# Altium PCB ip_phone_pcb.PcbDoc (part 2 of 3)
Units mil, origin at the board's own origin, x right, y up, seen from the top; angles counter-clockwise.
Board outline 2401.57 x 6885.83 mil, 6 copper layers (Component Side, Ground Plane, Inner Layer 1, Inner Layer 2, Power Plane, Solder Side), stack 60.4 mil thick; 371 components, 298 nets, 1234 pads, 663 vias.
Unrouted connection lines stored in the file: 204.
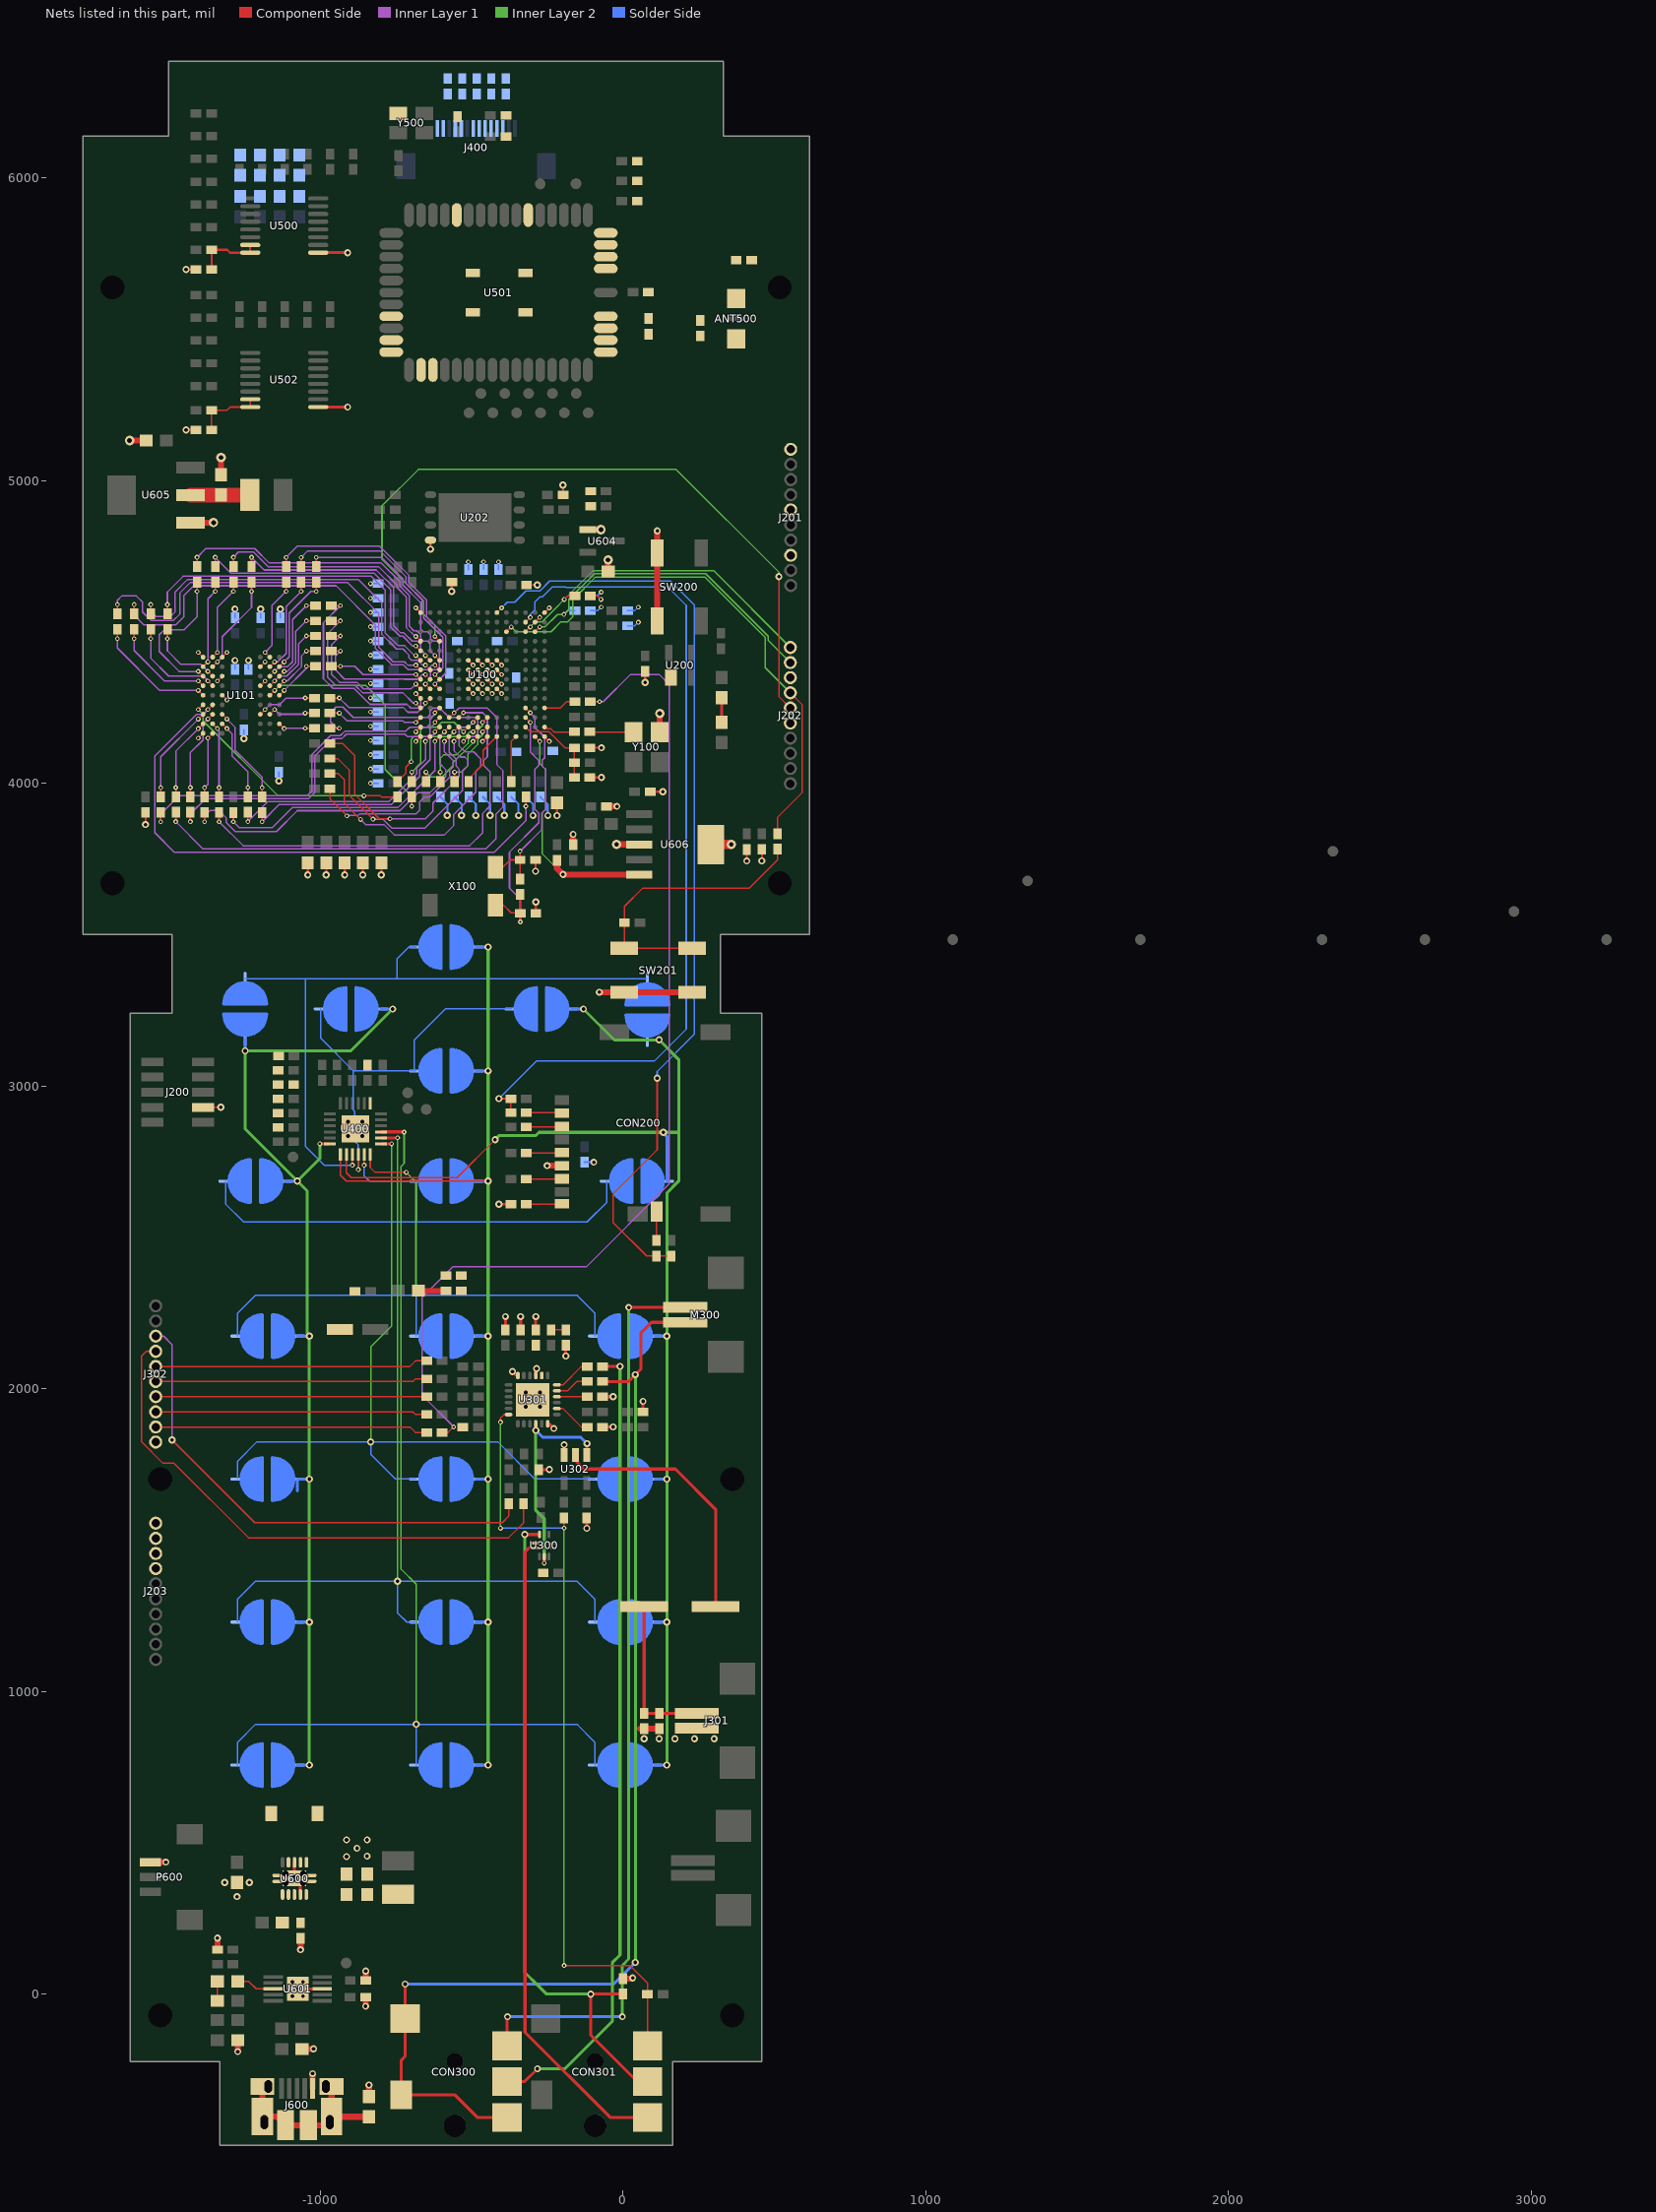
[diagram p6: the nets of this part, all layers, seen from the top]

## Via types
v1: diameter 15.75, hole 7.87, Component Side to Solder Side, tented top, 364 vias
v2: diameter 23.62, hole 11.81, Component Side to Solder Side, 201 vias
v3: diameter 23.62, hole 11.81, Component Side to Solder Side, tented bottom, 24 vias
v4: diameter 25.98, hole 12.99, Component Side to Solder Side, tented top, 23 vias
v5: diameter 31.5, hole 15.75, Component Side to Solder Side, 18 vias
v6: diameter 15.75, hole 7.87, Component Side to Solder Side, 13 vias
v7: diameter 23.62, hole 11.81, Component Side to Solder Side, tented top, 6 vias
v8: diameter 17.72, hole 11.81, Component Side to Solder Side, 5 vias
v9: diameter 19.68, hole 19.68, Component Side to Solder Side, 5 vias
v10: diameter 23.62, hole 11.81, Component Side to Solder Side, tented both sides, 4 vias

## Nets (pads, with @x,y where several pads share a name; then routed paths per layer and width w, separated by ;. In a path a pad name is that pad's centre, name@x,y a point inside that pad or via, vN(x,y) a via of type N, cw(c..) or ccw(c..) an arc to the next point about the centre after c; other vN are vias at no path point) (continued)
A5: R110.1 U101.J2 | length 221
  Component Side w5: R110.1@-1382.15,3955.42 v1(-1382.15,3986.08) ; v1(-1371.28,4149.64) U101.J2@-1355.54,4165.39
  Inner Layer 1 w5: v1(-1382.15,3986.08) -1371.28,3996.94 v1(-1371.28,4149.64)
A6: R112.1 U101.H3 | length 276.4
  Component Side w5: U101.H3@-1324.04,4196.88 v1(-1308.29,4181.13) ; R112.1@-1239.1,3955.7 v1(-1239.1,3986.36)
  Inner Layer 1 w5: v1(-1308.29,4181.13) -1291.83,4164.68 -1291.83,4091 -1239.1,4038.27 v1(-1239.1,3986.36)
A7: R114.1 U101.H2 | length 250.2
  Component Side w5: U101.H2@-1355.54,4196.88 v1(-1339.79,4181.13) ; R114.1@-1334.33,3955.51 v1(-1334.33,3986.17)
  Inner Layer 1 w5: v1(-1339.79,4181.13) -1334.33,4175.68 v1(-1334.33,3986.17)
A8: R116.1 U101.H1 | length 278.5
  Component Side w5: R116.1@-1477.33,3955.83 v1(-1477.33,3986.49) ; v1(-1402.78,4181.13) U101.H1@-1387.03,4196.88
  Inner Layer 1 w5: v1(-1477.33,3986.49) -1477.33,4106.58 v1(-1402.78,4181.13)
A9: R118.1 U101.G3 | length 327.8
  Component Side w5: U101.G3@-1324.04,4228.38 v1(-1308.29,4212.63) ; R118.1@-1192.15,3955.24 v1(-1192.15,3985.9)
  Inner Layer 1 w5: v1(-1308.29,4212.63) -1280.83,4185.17 -1280.83,4109 -1192.15,4020.31 v1(-1192.15,3985.9)
A10: R120.1 U101.H9 | length 123.1
  Component Side w5: U101.H9@-1135.06,4196.88 v1(-1119.32,4181.13) ; v1(-1049.69,4182.35) R120.1@-1019.03,4182.35
  Inner Layer 1 w5: v1(-1119.32,4181.13) -1118.09,4182.35 v1(-1049.69,4182.35)
A11: R122.1 U101.G2 | length 303.1
  Component Side w5: R122.1@-1429.1,3955.7 v1(-1429.1,3986.36) ; v1(-1371.28,4212.63) U101.G2@-1355.54,4228.38
  Inner Layer 1 w5: v1(-1429.1,3986.36) -1429.1,4101.57 -1387.41,4143.27 -1387.41,4196.51 v1(-1371.28,4212.63)
A12: R124.1 U101.G1 | length 331
  Component Side w5: R124.1@-1527.15,3955.42 v1(-1527.15,3986.08) ; v1(-1402.78,4212.63) U101.G1@-1387.03,4228.38
  Inner Layer 1 w5: v1(-1527.15,3986.08) -1527.15,4088.26 v1(-1402.78,4212.63)
ABE0: R132.2 U101.E8 | length 822.9
  Component Side w5: U101.E8@-1166.56,4291.37 v1(-1150.81,4307.12) ; v1(-697.85,3924.55) R132.2@-697.85,3955.21
  Inner Layer 2 w5: v1(-1150.81,4307.12) -1134.69,4323.24 -1112.95,4323.24 -1112.67,4323.52 -849.37,4323.52 -785.83,4259.98 -785.83,4045.57 -697.85,3957.59 v1(-697.85,3924.55)
ABE1: R131.2 U101.F1 | length 812.6
  Component Side w5: v1(-1402.78,4244.13) U101.F1@-1387.03,4259.87 ; v1(-855.83,3959) -801.83,3959 -798.05,3955.21 R131.2@-744.85,3955.21
  Inner Layer 2 w5: v1(-1402.78,4244.13) -1387.03,4228.38 -1387.03,4206.64 -1139.4,3959 v1(-855.83,3959)
AGND: ANT500.B C100.1 C101.1 C102.1 C103.1 C104.1 C105.1 C106.1 C107.1 C108.1 C109.1 C110.1 C200.1 C201.1 C202.1 C300.1 C301.1 C302.1 C303.2 C304.1 C307.1 C309.1 C310.2 C311.2 C312.2 C313.2 C314.1 C315.1 C400.2 C401.2 C402.2 C403.2 C404.2 C405.1 C500.2 C501.2 C502.2 C503.2 C504.2 C505.1 C506.1 C507.1 C508.1 C509.1 C600.1 C601.1 C602.1 C603.1 C604.1 C605.1 C610.2 C611.1 C612.1 C613.1 C614.1 C615.1 C616.1 C617.1 C618.1 C619.1 C620.1 C621.1 C622.1 C623.1 C624.1 C625.1 C626.1 C627.1 C628.1 C629.1 C630.1 C631.1 C632.1 C633.1 C634.1 C635.1 C636.1 C637.1 C638.1 C639.1 C640.1 C641.1 C642.1 C643.1 C644.1 C645.1 C646.1 C647.1 C648.1 C649.2 C650.1 C651.2 C652.1 C653.1 C654.1 C655.1 C656.1 CON200.6 J200.7 J201.3 J201.6 J201.10 J202.3 J202.6 J203.7 J203.8 J203.9 J203.10 J301.2 J302.10 J400.7 J600.5 L500.1 L500.2 L602.2 P600.1 R143.1 R144.1 R222.1 R235.1 R303.2 R314.2 R316.1 R318.2 R412.1 R605.1 R606.2 R608.2 R615.1 SW200.1 SW200.2 SW201.1 SW201.2 U100.A1 U100.A14 U100.B2 U100.F6 U100.F7 U100.F8 U100.F9 U100.G6 U100.G7 U100.G8 U100.G9 U100.G14 U100.H6 U100.H7 U100.H8 U100.H9 U100.J6 U100.J7 U100.J8 U100.J9 U100.P1 U100.P13 U100.P14 U101.A1 U101.A3 U101.B7 U101.C3 U101.D7 U101.E3 U101.J1 U200.1 U202.4 U300.6 U301.3 U301.6 U301.18 U302.3 U400.0 U400.19 U500.1 U501.6 U501.12 U501.24 U501.26 U501.27 U501.29 U501.30 U501.44 U501.45 U501.46 U501.47 U501.49 U501.50 U501.51 U501.52 U501.53 U501.54 U501.55 U501.56 U502.1 U600.3 U600.9 U600.15 U601.3 U604.1 U605.1 U606.3 U606.6 Y100.2 Y500.2 | length 5226.3
  Component Side w5: v1(-1402.78,4149.64) U101.J1@-1387.03,4165.39 ; v1(-1402.78,4433.1) U101.A1@-1387.03,4417.35 ; J200.7@-1387,2929.89 v2(-1328.21,2929.89) ; v1(-1339.79,4338.61) U101.C3@-1324.04,4354.36 ; U101.E3@-1324.04,4291.37 v1(-1308.29,4275.62) ; U101.A3@-1324.04,4417.35 v1(-1308.29,4433.1) ; U101.D7@-1198.06,4322.87 v1(-1182.31,4338.61) ; U101.B7@-1198.06,4385.86 v1(-1182.31,4401.61)
  Component Side w7: v2@-1577.19,3864.26 R144.1@-1577.19,3904.24 ; v2(-1443.23,5168.23) C508.1@-1410.27,5168.23 ; v2(-1443.23,5698.23) C507.1@-1410.27,5698.23 ; v2@-1041,3697.91 C613.1@-1041,3737.89 ; v2@-980,3697.91 C614.1@-980,3737.89 ; v2@-919,3697.91 C626.1@-919,3737.89 ; v2@-859,3697.91 C625.1@-859,3737.89 ; v2@-798,3697.91 C652.1@-798,3737.89 ; v1(-684.23,4139.16) U100.P14@-668.48,4154.91 ; v1(-684.23,4170.65) U100.P13@-668.48,4186.4 ; v1(-684.23,4580.1) U100.P1@-668.48,4564.35 ; v2(-635.74,4773.91) U202.4@-635.74,4803.99 ; v2(-565.74,4634.09) R222.1@-565.74,4665.99 ; U100.J9@-511,4312.39 v1(-495.25,4296.64) ; U100.J8@-511,4343.88 v1(-495.25,4328.13) ; U100.J7@-511,4375.38 v1(-495.25,4359.63) ; U100.J6@-511,4406.87 v1(-495.25,4391.13) ; U100.H9@-479.5,4312.39 v1(-463.76,4296.64) ; U100.H8@-479.5,4343.88 v1(-463.76,4328.13) ; U100.H7@-479.5,4375.38 v1(-463.76,4359.63) ; U100.H6@-479.5,4406.87 v1(-463.76,4391.13) ; v1(-463.76,4139.16) U100.G14@-448.01,4154.91 ; U100.G9@-448.01,4312.39 v1(-432.26,4296.64) ; U100.G8@-448.01,4343.88 v1(-432.26,4328.13) ; U100.G7@-448.01,4375.38 v1(-432.26,4359.63) ; U100.G6@-448.01,4406.87 v1(-432.26,4391.13) ; U100.F9@-416.51,4312.39 v1(-400.76,4296.64) ; U100.F8@-416.51,4343.88 v1(-400.76,4328.13) ; U100.F7@-416.51,4375.38 v1(-400.76,4359.63) ; U100.F6@-416.51,4406.87 v1(-400.76,4391.13) ; v2(-409.76,2609.62) R235.1@-370.34,2609.62 ; U100.B2@-290.53,4532.86 v1(-274.78,4548.61) ; v2(-288.85,3710.02) C109.1@-288.85,3747.39 ; C110.1@-287.85,3571.39 v2(-287.85,3608.77) ; U100.A14@-259.03,4154.91 v1(-243.28,4139.16) ; U100.A1@-259.03,4564.35 v1(-243.28,4580.1) ; v2@-218,3893.94 C637.1@-218,3933.92 ; C201.1@-198,4953.89 v2(-198,4985.65) ; C101.1@-109.18,4019.85 v2(-70.98,4019.85) ; R143.1@-109.18,4117.85 v2(-70.98,4117.85) ; v2(73.15,4334.02) C200.1@73.15,4370.39 ; C100.1@91.61,3972.85 v2(131.58,3972.85) ; v2(408.97,3743.83) C649.2@408.97,3782.03 ; v2(458.97,3744.02) C650.1@458.97,3782.21
  Component Side w10: U600.3@-1085.28,435.52 v9(-1085.28,382.37) -1065.59,362.69 U600.9@-1065.59,329.22 ; v8(-1074.34,17.35) U601.3@-993.63,17.35 ; U502.1@-1006.91,5243.52 v2(-909.52,5243.52) ; U500.1@-1006.91,5753.52 v2(-909.52,5753.52) ; C312.2@-388.2,2194.96 v2(-388.2,2238.62) ; v7(-365.2,2056.62) -352.36,2043.78 U301.6@-347.26,2043.78 ; C313.2@-338.2,2194.96 v2(-338.2,2238.62) ; U301.3@-288.2,2043.78 -288.2,2063.62 v7(-285.2,2066.62) ; C310.2@-288.2,2194.96 v2(-288.2,2238.62) ; R303.2@-277.57,1733.15 v2(-243.07,1733.15) ; U301.18@-248.83,1884.33 -244.07,1884.33 v7(-228.63,1868.9) ; U302.3@-194.44,1780.65 v2(-194.44,1815.16) ; v2(-188.93,2107.96) C304.1@-188.93,2143.71 ; v3(-119.64,1539.07) C315.1@-119.64,1573.72 ; C311.2@-67.14,1873.9 v2(-32.63,1873.9) ; C307.1@-67.14,1973.9 v2(-32.63,1973.9) ; R316.1@66.23,1923.9 v2(66.23,1958.4)
  Component Side w20: v5(-1629.89,5132.89) C635.1@-1575,5132.89 ; P600.1@-1561,435.89 -1560.74,436.15 v2(-1509.88,436.15) ; U605.1@-1427.96,4861.89 v5(-1352.58,4861.89) ; R608.2@-1339.5,146.98 v2(-1339.5,184.93) ; C636.1@-1328,5021.86 v5(-1328,5076.75) ; v2(-1272.63,-189.96) C605.1@-1272.63,-152.02 ; v2(-1064.91,146.57) C603.1@-1064.91,184.52 ; C604.1@-1060,-181.11 v2(-1022.06,-181.11) ; J600.5@-1025.64,-312.11 v2@-1025.64,-262.5 ; v2(-850,-39.97) R605.1@-850,-10.33 R605.1@-850,-10.11 ; R606.2@-849.82,46.89 v2(-849.82,76.6) ; L602.2@-839,-338.18 v2(-839,-300.24) ; v2(-250.28,2737.14) CON200.6@-201.83,2737.14 ; R615.1@-164.85,3797.39 v2(-164.85,3831.98) ; U604.1@-116.12,4838.48 v5(-72.73,4838.48) ; v2(-78.2,3310.22) SW201.2@4.59,3310.22 SW201.1@229,3310.22 ; C651.2@-54.67,3924.39 v2(-20.08,3924.39) ; C612.1@-49.12,4700.48 v5(-49.12,4738.39) ; v5(-21.23,3798.39) U606.3@54.15,3798.39 ; R314.2@0,51.18 29.75,51.18 v2(31.99,53.42) ; R318.2@56.96,876.67 R318.2@69.96,876.67 C309.1@106.96,876.67 ; SW200.1@113.26,4536.99 SW200.2@113.26,4761.4 v2(113.26,4834.78) ; Y100.2@121.64,4169.85 v5(121.64,4231.06)
  Component Side w30: U606.6@290.37,3798.39 v5(357.56,3798.39)
  Solder Side w5: C107.1@-1282.03,4377.35 v2(-1282.03,4406.35) ; C105.1@-1282.03,4547.35 v2(-1282.03,4576.35) ; v2(-1252.03,4148.35) C106.1@-1252.03,4177.35 ; C108.1@-1237.03,4377.35 v2(-1237.03,4406.35) ; C103.1@-1197.03,4547.35 v2(-1197.03,4576.35) ; v2(-1137.03,4008.35) C104.1@-1137.03,4037.35 ; C102.1@-1132.03,4547.35 v2(-1132.03,4576.35) ; v1(-834,4000.89) C631.1@-809,4000.89 ; v1(-834,4047.89) C654.1@-809,4047.89 ; v1(-834,4094.89) C655.1@-809,4094.89 ; v1(-834,4141.89) C632.1@-809,4141.89 ; v1(-834,4188.89) C618.1@-809,4188.89 ; v1(-834,4235.89) C656.1@-809,4235.89 ; v1(-834,4282.89) C634.1@-809,4282.89 ; v1(-834,4329.89) C633.1@-809,4329.89 ; v1(-834,4376.89) C627.1@-809,4376.89 ; v1(-834,4423.89) C628.1@-809,4423.89 ; v1(-834,4470.89) C617.1@-809,4470.89 ; v1(-834,4517.89) C620.1@-809,4517.89 ; v1(-834,4564.89) C619.1@-809,4564.89 ; v1(-834,4611.89) C621.1@-809,4611.89 ; v1(-834,4659.89) C622.1@-809,4659.89 ; C653.1@-511,4706.89 v1(-511,4731.89) ; C629.1@-460.63,4707.17 v1(-460.63,4732.17) ; C630.1@-411,4706.89 v1(-411,4731.89)
  Solder Side w7: C639.1@-603.85,3955.39 -580.15,3931.69 v2(-580.15,3894.24) ; C638.1@-556.85,3955.39 -533.15,3931.69 v2(-533.15,3894.24) ; C642.1@-509.85,3955.21 -486.15,3931.51 v2(-486.15,3894.06) ; C641.1@-462.85,3955.39 -439.15,3931.69 v2(-439.15,3894.24) ; C640.1@-415.85,3955.39 -392.15,3931.69 v2(-392.15,3894.24) ; C643.1@-368.85,3955.21 -345.15,3931.51 v2(-345.15,3894.06) ; C645.1@-320.85,3955.21 -297.15,3931.51 v2(-297.15,3894.06) ; C644.1@-272.74,3955.21 -249.04,3931.51 -249.04,3894.06 -248.98,3894 v2(-247.83,3894) ; C202.1@-127.34,2748.62 v2(-96.53,2748.62)
  other v2: -1025.51,-262.5 -1274.91,322.22 -1315.67,368.52 -1234.26,368.52 -913.09,454.19 -845.09,455.77 -878.63,481.98 -913.09,509.77 -845.09,509.77 69.55,843.55 119.37,843.55 171.37,843.55 236.37,843.55 301.37,843.55 -1041.3,3697.91 -980.3,3697.91 -919.3,3697.91 -859.3,3697.91 -798.3,3697.91 -1577.48,3864.26 -218.3,3893.94
  other v4: -321.67,1940.43 -274.42,1940.43 -321.67,1987.68 -274.42,1987.68 -907.9,2835.05 -860.65,2835.05 -907.9,2882.3 -860.65,2882.3
  other v8: -1092.06,-6.27 -1056.62,-6.27 -1092.06,40.98 -1056.62,40.98
  other v9: -1114.8,366.62 -1055.75,366.62 -1114.8,398.12 -1055.75,398.12
AVCC3V3: C301.2 C302.2 C310.1 C311.1 L300.2 U301.2 U301.20 | length 211.1
  Component Side w5: U301.20@-218.32,1934.53 -198.02,1934.53 -137.39,1873.9 C311.1@-118.32,1873.9
  Component Side w20: L300.2@-670.86,2323.39 C301.2@-584.85,2323.39
BA0: R126.1 U101.G7 | length 201.4
  Component Side w5: U101.G7@-1198.06,4228.38 v1(-1182.31,4244.13) ; v1(-1049.69,4282.35) R126.1@-1019.03,4282.35
  Inner Layer 1 w5: v1(-1182.31,4244.13) -1166.56,4259.87 -1135.06,4259.87 -1112.58,4282.35 v1(-1049.69,4282.35)
BA1: R128.1 U101.G8 | length 161.9
  Component Side w5: U101.G8@-1166.56,4228.38 v1(-1150.81,4244.13) ; v1(-1049.69,4232.35) R128.1@-1019.03,4232.35
  Inner Layer 1 w5: v1(-1150.81,4244.13) -1135.44,4228.75 -1053.3,4228.75 v1(-1049.69,4232.35)
BUTTON: R205.1 R223.1 SW201.3 SW201.4 | length 966.3
  Component Side w5: R223.1@4.59,3540.02 SW201.4@4.59,3455.89 SW201.3@229,3455.89 ; R223.1@4.97,3540.39 4.97,3593.39 65.97,3654.39 417.97,3654.39 509.97,3746.39 R205.1@509.97,3782.8
CLKOUT: R142.2 U101.F2 | length 1889.1
  Component Side w5: v1(-1371.28,4244.13) U101.F2@-1355.54,4259.87 ; v1(-320.85,3924.55) R142.2@-320.85,3955.21
  Inner Layer 1 w5: v1(-1371.28,4244.13) -1387.41,4228 -1409.15,4228 -1546.83,4090.32 -1546.83,3837.6 -1481.24,3772 -425.83,3772 -320.85,3876.98 v1(-320.85,3924.55)
COL: J202.4 pad.@360.91,1701.68 R205.2 U100.E3 | length 1791.3
  Component Side w5: U100.E3@-385.02,4501.36 v1(-369.27,4517.11) ; R205.2@509.97,3833.98 509.97,3887.39 591.37,3968.79 591.37,4260.99 J202.4@552.97,4299.39
  Inner Layer 2 w5: v1(-369.27,4517.11) -353.52,4501.36 -237.82,4501.36 -205.41,4533.77 -182.66,4533.77 -166.03,4550.39 -166.03,4606.82 -90.46,4682.39 269.97,4682.39 469.97,4482.39 469.97,4382.39 J202.4@552.97,4299.39
COL1: KB400.2 KB403.2 KB406.2 KB409.2 KB412.2 KB415.2 KB418.2 U400.8 | length 4360.1
  Component Side w5: U400.8@-913.8,2773.95 -913.8,2713.76 -897.84,2697.8 -547.84,2697.8 v3(-422.34,2823.3)
  Inner Layer 2 w10: v3(-422.34,2823.3) -408.24,2837.39 -287.03,2837.39 -277.03,2847.39 184.27,2847.39 ; v3(-130.69,3254.83) -28.71,3152.85 v10(119.54,3152.85) 184.27,3088.12 184.27,2685.93 144.9,2646.56 v3(144.9,1229.24) v3(144.9,756.8)
  Solder Side w10: KB403.2@-169.83,3254.83 v3(-130.69,3254.83) ; KB400.2@80.4,3152.85 v10(119.54,3152.85) ; KB418.2@105.76,756.8 v3(144.9,756.8) ; KB415.2@105.76,1229.24 v3(144.9,1229.24) ; KB412.2@105.76,1701.68 v3(144.9,1701.68) ; KB409.2@105.76,2174.12 v3(144.9,2174.12) ; v10@132.37,2847.39 145.13,2834.63 KB406.2@145.13,2685.93
  other v10: 133.37,2847.39
COL2: KB401.2 KB404.2 KB407.2 KB410.2 KB413.2 KB416.2 KB419.2 U400.7 | length 3541.1
  Component Side w5: U400.7@-933.49,2773.95 -933.49,2705.44 -913.98,2685.93 v3(-445.65,2685.93)
  Inner Layer 2 w10: v3(-445.65,756.8) v3(-445.65,1229.24) v3(-445.65,2685.93) v3(-445.65,3459.55)
  Solder Side w10: KB419.2@-484.79,756.8 v3(-445.65,756.8) ; KB416.2@-484.79,1229.24 v3(-445.65,1229.24) ; KB413.2@-484.79,1701.68 v3(-445.65,1701.68) ; KB410.2@-484.79,2174.12 v3(-445.65,2174.12) ; KB407.2@-484.79,2685.93 v3(-445.65,2685.93) ; KB404.2@-484.79,3050.1 v3(-445.65,3050.1) ; KB401.2@-484.79,3459.55 v3(-445.65,3459.55)
COL3: KB402.2 KB405.2 KB408.2 KB411.2 KB414.2 KB417.2 KB420.2 U400.6 | length 3492.4
  Component Side w10: v6(-1001.49,2809.46) U400.6@-969,2809.46
  Inner Layer 2 w10: v3(-1075.57,2685.93) -1001.49,2760.01 v6(-1001.49,2809.46) ; v3(-1036.2,756.8) v3(-1036.2,1229.24) v3(-1036.2,2174.12) -1043,2180.91 -1043,2653.36 -1248.34,2858.7 v3(-1248.34,3116.51) -898.93,3116.51 v3(-760.61,3254.83)
  Solder Side w10: v3(-1248.34,3116.51) KB402.2@-1248.34,3155.65 ; KB408.2@-1114.71,2685.93 v3(-1075.57,2685.93) ; KB420.2@-1075.34,756.8 v3(-1036.2,756.8) ; KB417.2@-1075.34,1229.24 v3(-1036.2,1229.24) ; -1075.34,1662.54 KB414.2@-1075.34,1701.68 v3(-1036.2,1701.68) ; KB411.2@-1075.34,2174.12 v3(-1036.2,2174.12) ; KB405.2@-799.75,3254.83 v3(-760.61,3254.83)
CRS_DV: J202.5 U100.M4 | length 2492.3
  Component Side w5: v1(-621.24,4485.61) U100.M4@-605.49,4469.87 ; v2(514.97,4683.39) 514.97,4287.39 J202.5@552.97,4249.39
  Inner Layer 2 w5: v1(-621.24,4485.61) -621.24,4521.5 -663.03,4563.29 -663.03,4606.54 -796.03,4739.54 -796.03,4917.39 -676.01,5037.41 175.95,5037.41 514.97,4698.39 v2(514.97,4683.39)
CS_SDCARD: R229.1 R232.1 U100.C2 | length 2823.8
  Component Side w5: v2(-409.76,2958.62) R229.1@-370.34,2958.62 R232.1@-370.34,2912.62 ; U100.C2@-322.02,4532.86 v1(-306.28,4548.61)
  Solder Side w5: v2(-409.76,2958.62) -285.99,3082.39 102.97,3082.39 208.97,3188.39 208.97,4588.11 148.68,4648.39 -151.8,4648.39 -151.97,4648.22 -187.8,4648.22 -187.97,4648.39 -234.03,4648.39 -266.03,4616.39 -274.03,4616.39 -290.9,4599.52 -290.9,4573.73 -306.28,4558.36 v1(-306.28,4548.61)
D0: R101.2 U101.A8 | length 282.9
  Component Side w5: v1(-1182.31,4433.1) U101.A8@-1166.56,4417.35 ; v1(-1112.96,4634.3) R101.2@-1112.96,4664.96
  Inner Layer 1 w5: v1(-1182.31,4433.1) -1159.15,4456.26 -1159.15,4588.11 v1(-1112.96,4634.3)
D1: R103.2 U101.B9 | length 340.3
  Component Side w5: U101.B9@-1135.06,4385.86 v1(-1119.31,4401.61) ; v1(-1012.96,4634.3) R103.2@-1012.96,4664.96
  Inner Layer 1 w5: v1(-1119.31,4401.61) -1102.72,4418.2 -1102.72,4562.66 -1031.08,4634.3 v1(-1012.96,4634.3)
D2: R105.2 U101.B8 | length 327.8
  Component Side w5: U101.B8@-1166.56,4385.86 v1(-1150.81,4401.61) ; v1(-1062.96,4634.3) R105.2@-1062.96,4664.96
  Inner Layer 1 w5: v1(-1150.81,4401.61) -1141.06,4401.61 -1112.72,4429.94 -1112.72,4584.35 -1112.81,4584.44 v1(-1062.96,4634.3)
D3: R107.2 U101.C9 | length 256.6
  Component Side w5: U101.C9@-1135.06,4354.36 v1(-1119.31,4370.11) ; v1(-1045.87,4537.35) R107.2@-1015.21,4537.35
  Inner Layer 1 w5: v1(-1119.31,4370.11) -1109.13,4370.11 -1081.25,4397.99 -1081.25,4501.98 v1(-1045.87,4537.35)
D4: R109.2 U101.C8 | length 329.8
  Component Side w5: U101.C8@-1166.56,4354.36 v1(-1150.81,4370.11) ; v1(-1045.87,4587.35) R109.2@-1015.21,4587.35
  Inner Layer 1 w5: v1(-1150.81,4370.11) -1135.44,4385.48 -1107.9,4385.48 -1091.25,4402.13 -1091.25,4541.98 v1(-1045.87,4587.35)
D5: R111.2 U101.D9 | length 188.3
  Component Side w5: U101.D9@-1135.06,4322.87 v1(-1119.31,4338.61) ; v1(-1045.87,4437.35) R111.2@-1015.21,4437.35
  Inner Layer 1 w5: v1(-1119.31,4338.61) -1108.77,4338.61 -1061.25,4386.13 -1061.25,4421.98 v1(-1045.87,4437.35)
D6: R113.2 U101.D8 | length 259.4
  Component Side w5: U101.D8@-1166.56,4322.87 v1(-1150.81,4338.61) ; v1(-1045.87,4487.35) R113.2@-1015.21,4487.35
  Inner Layer 1 w5: v1(-1150.81,4338.61) -1134.69,4354.74 -1110.36,4354.74 -1071.25,4393.85 -1071.25,4461.98 v1(-1045.87,4487.35)
D7: R115.2 U101.E9 | length 163.6
  Component Side w5: U101.E9@-1135.06,4291.37 v1(-1119.31,4307.12) ; v1(-1045.87,4387.35) R115.2@-1015.21,4387.35
  Inner Layer 1 w5: v1(-1119.31,4307.12) -1045.87,4380.56 v1(-1045.87,4387.35)
D8: R117.2 U101.E1 | length 409.6
  Component Side w5: v1(-1670.03,4478.51) R117.2@-1670.03,4509.17 ; v1(-1402.78,4307.12) U101.E1@-1387.03,4291.37
  Inner Layer 1 w5: v1(-1670.03,4478.51) -1670.03,4447.12 -1530.03,4307.12 v1(-1402.78,4307.12)
D9: R119.2 U101.D2 | length 337.3
  Component Side w5: v1(-1560.03,4478.51) R119.2@-1560.03,4509.17 ; v1(-1371.28,4338.61) U101.D2@-1355.54,4322.87
  Inner Layer 1 w5: v1(-1560.03,4478.51) -1560.03,4414.12 -1500.65,4354.74 -1387.41,4354.74 v1(-1371.28,4338.61)
D10: R121.2 U101.D1 | length 346.2
  Component Side w5: v1(-1615.03,4478.51) R121.2@-1615.03,4509.17 ; v1(-1402.78,4338.61) U101.D1@-1387.03,4322.87
  Inner Layer 1 w5: v1(-1615.03,4478.51) -1615.03,4439.12 -1514.52,4338.61 v1(-1402.78,4338.61)
D11: R123.2 U101.C2 | length 255.2
  Component Side w5: v1(-1505.03,4478.51) R123.2@-1505.03,4509.17 ; v1(-1371.28,4370.11) U101.C2@-1355.54,4354.36
  Inner Layer 1 w5: v1(-1505.03,4478.51) -1505.03,4438.12 -1460.15,4393.24 -1394.41,4393.24 v1(-1371.28,4370.11)
D12: R125.2 U101.C1 | length 498.5
  Component Side w5: v1(-1407.03,4634.51) R125.2@-1407.03,4665.17 ; v1(-1402.78,4370.11) U101.C1@-1387.03,4354.36
  Inner Layer 1 w5: v1(-1407.03,4634.51) -1407.03,4550.35 -1449.15,4508.24 -1515.15,4508.24 -1532.15,4491.24 -1532.15,4436.24 -1466.02,4370.11 v1(-1402.78,4370.11)
D13: R127.2 U101.B2 | length 332.5
  Component Side w5: U101.B2@-1355.54,4385.86 v1(-1339.79,4401.61) ; v1(-1227.03,4634.51) R127.2@-1227.03,4665.17
  Inner Layer 1 w5: v1(-1339.79,4401.61) -1323.67,4417.73 -1323.67,4484.72 -1227.03,4581.35 v1(-1227.03,4634.51)
D14: R129.2 U101.B1 | length 295.9
  Component Side w5: U101.B1@-1387.03,4385.86 v1(-1371.28,4401.61) ; v1(-1347.03,4634.51) R129.2@-1347.03,4665.17
  Inner Layer 1 w5: v1(-1371.28,4401.61) -1371.28,4610.26 v1(-1347.03,4634.51)
D15: R130.2 U101.A2 | length 276.2
  Component Side w5: U101.A2@-1355.54,4417.35 v1(-1339.79,4433.1) ; v1(-1287.03,4634.51) R130.2@-1287.03,4665.17
  Inner Layer 1 w5: v1(-1339.79,4433.1) -1339.79,4581.76 v1(-1287.03,4634.51)
DET_SDCARD: R230.1 R236.1 U100.F1 | length 3117.8
  Component Side w5: U100.F1@-416.51,4564.35 v1(-400.76,4580.1) ; v2(113,3026.42) 113,2789.42 -33.03,2643.39 -33.03,2549.69 77.85,2438.8 R230.1@159.16,2438.8
  Solder Side w5: v1(-400.76,4580.1) -382.03,4598.83 -357.59,4598.83 -320.03,4636.39 -274.32,4636.39 -242.32,4668.39 -179.68,4668.39 -179.51,4668.22 -160.25,4668.22 -160.08,4668.39 156.97,4668.39 186.97,4638.39 187.11,4638.39 235.97,4589.54 235.97,3171.36 113,3048.39 v2(113,3026.42)
EXT_WAKE: R614.2 U100.B14 U606.5 | length 811.4
  Component Side w5: U100.B14@-290.53,4154.91 v1(-274.78,4139.16)
  Component Side w20: R614.2@-217.85,3746.21 -217.85,3719.02 -197.23,3698.39 U606.5@54.15,3698.39
  Inner Layer 2 w5: v1(-274.78,4139.16) -274.78,4065.94 -255.83,4047 -255.83,3913.31 -267.15,3902 -267.15,3768.31 v2(-197.83,3699)
HP_GND: CON301.1 U300.7 | length 2148.6
  Component Side w10: U300.7@-288.74,1474.33 -310.2,1474.33 -323.63,1460.9 -323.63,-126.26 -42.68,-407.22 CON301.1@81,-407.22
HP_OUT: CON301.3 R314.1 U300.5 | length 2235.6
  Component Side w10: v2(-324.38,1518.62) U300.5@-275.95,1518.62 ; R314.1@0,0 v2(-106.45,0) -106.45,-135.45 47.21,-289.11 CON301.3@81,-289.11
  Inner Layer 2 w10: v2(-324.38,1518.62) -324.38,72.32 -281.01,28.95 -252.06,0 v2(-106.45,0)
JACK_EN: CON301.5 R310.1 R317.2 R409.1 U301.12 | length 2594.1
  Component Side w5: v6(-404.63,1889.9) -404.63,1902.9 -392.69,1914.84 U301.12@-377.77,1914.84 ; v6(-194.44,94.55) 23.12,94.55 80.55,37.12 80.55,0.45 R310.1@81,0 ; v6(-194.44,1539.98) R317.2@-194.44,1573.72 ; R310.1@76.97,0 R310.1@81,0 ; CON301.5@81,-171 R310.1@81,0
  Inner Layer 2 w5: v6@-404.63,1539.98 v6(-404.63,1889.9) ; v6(-194.44,94.55) v6(-194.44,1539.98)
  Solder Side w5: v6@-403.55,1539.98 v6(-194.44,1539.98)
  other v6: -404.63,1539.26
L\C\D\_\C\S\: J400.1 R402.1 R411.1 R412.2
L\C\D\_\R\E\S\E\T\: J400.2 R400.1 R410.1
LED1: D204.2 R203.1 | length 40
  Solder Side w5: R203.1@-107.74,4619.99 -84.68,4619.99 v1@-72.68,4631.99
  other v1: -71.87,4631.99
LED2: D203.2 R208.1 | length 40
  Component Side w5: R208.1@-107.74,4619.99 -84.68,4619.99 v1(-72.68,4607.99)
LED3: D202.2 R209.1 | length 40
  Solder Side w5: R209.1@-107.85,4570.39 -84.79,4570.39 v1@-72.79,4582.39
  other v1: -71.98,4582.39
LED4: D201.2 R215.1 | length 36.1
  Component Side w5: R215.1@-318.74,4655.99 v2(-282.63,4655.99)
LIN1: KB400.1 KB401.1 KB402.1 U400.9 | length 2240
  Component Side w5: v6(-894.12,2738.95) U400.9@-894.12,2773.95
  Solder Side w5: KB402.1@-1248.34,3354 KB400.1@77.6,3354 ; -1048.83,3354 -1048.83,2801 -986.79,2738.95 v6(-894.12,2738.95) ; -745.83,3354 -745.83,3421 -707.28,3459.55 KB401.1@-683.15,3459.55
LIN2: KB403.1 KB404.1 KB405.1 U400.10 | length 1307.5
  Component Side w5: v6(-874.43,2723.95) U400.10@-874.43,2773.95
  Solder Side w5: KB405.1@-998.11,3254.83 -998.11,3157.71 -890.5,3050.1 ; v6(-874.43,2723.95) -874.43,2805.6 -886.63,2817.8 -886.63,2916.8 -890.5,2920.67 -890.5,3050.1 ; KB403.1@-368.19,3254.83 -587.01,3254.83 -688.83,3153 -688.83,3055.79 KB404.1@-683.15,3050.1 -890.5,3050.1
LIN3: KB406.1 KB407.1 KB408.1 U400.11 | length 1840.1
  Component Side w5: v6(-854.75,2738.95) U400.11@-854.75,2773.95
  Solder Side w5: KB408.1@-1313.06,2685.93 -1313.06,2610.74 -1253.37,2551.05 -118.79,2551.05 -53.22,2616.61 KB406.1@-53.22,2685.93 ; v6(-854.75,2738.95) -854.75,2702.91 -837.76,2685.93 KB407.1@-683.15,2685.93 -683.15,2551.74
LIN4: KB409.1 KB410.1 KB411.1 U400.12 | length 2105.9
  Component Side w5: U400.12@-835.06,2773.95 -835.06,2731.23 -818.83,2715 v6(-715.83,2715)
  Inner Layer 2 w5: v6(-715.83,2715) -683.83,2683 -683.83,2309
  Solder Side w5: KB411.1@-1273.7,2174.12 -1273.7,2249.3 -1214,2309 -150,2309 ; KB410.1@-683.15,2174.12 -683.15,2308.85 ; -152.29,2309 -92.59,2249.3 KB409.1@-92.59,2174.12
LIN5: KB412.1 KB413.1 KB414.1 U400.13 | length 2590.5
  Component Side w10: U400.13@-799.55,2809.46 v6(-764.55,2809.46)
  Inner Layer 2 w5: v2(-833.26,1824.79) -833.26,2138.47 -764.55,2207.18 v6(-764.55,2809.46)
  Solder Side w5: KB414.1@-1273.7,1701.68 -1273.7,1759.79 -1208.7,1824.79 -414.01,1824.79 -290.9,1701.68 KB412.1@-92.59,1701.68 ; v2(-833.26,1824.79) -833.26,1783.65 -751.28,1701.68 KB413.1@-683.15,1701.68
LIN6: KB415.1 KB416.1 KB417.1 U400.14 | length 3081.2
  Component Side w10: U400.14@-799.55,2829.15 v6(-744.55,2829.15)
  Inner Layer 2 w5: v3@-745.83,1364.12 -744.55,1365.4 v6(-744.55,2829.15)
  Solder Side w5: KB417.1@-1273.7,1229.24 -1273.7,1304.42 -1214,1364.12 -152.29,1364.12 -92.59,1304.42 KB415.1@-92.59,1229.24 ; v3@-744.55,1365.4 -744.55,1259.72 -714.07,1229.24 KB416.1@-683.15,1229.24
  other v3: -744.83,1364.12
LIN7: KB418.1 KB419.1 KB420.1 U400.15 | length 3575.9
  Component Side w10: U400.15@-799.55,2848.83 v6@-722.83,2848.83
  Inner Layer 2 w5: v6(-722.83,2848) -722.83,2745 -732.83,2735 -732.83,1404 -683.15,1354.31 v3@-683.15,891.53
  Solder Side w5: KB420.1@-1273.7,756.8 -1273.7,831.98 -1214,891.68 -150,891.68 ; KB419.1@-683.15,756.8 v3@-683.15,891.53 ; -152.29,891.68 -92.59,831.98 KB418.1@-92.59,756.8
  other v3: -682.83,891.68
MCLK: R326.2 U100.A11 | length 108.7
  Component Side w5: U100.A11@-259.03,4249.39 -207.44,4249.39 -186.44,4270.39 R326.2@-159.03,4270.39
MCLK_CON: R325.1 R326.1 R333.2 | length 3449.7
  Component Side w5: R333.2@-597.45,1855.79 -577.72,1855.79 v1(-559.61,1873.9) ; R326.1@-107.85,4270.39 v1(-77.19,4270.39)
  Inner Layer 1 w5: v1(-559.61,1873.9) -559.61,1874.62 -663.04,1978.06 -663.04,2302.19 -561.18,2404.06 -119.75,2404.06 153.15,2676.95 153.15,4326.39 119.15,4360.39 24.81,4360.39 -65.19,4270.39 v1(-77.19,4270.39)
MDC: J202.1 R208.2 U100.C3 | length 1104.4
  Component Side w5: U100.C3@-322.02,4501.36 v1(-306.28,4517.11) ; v1(-193.98,4607.99) -181.98,4619.99 R208.2@-158.92,4619.99
  Inner Layer 2 w5: v1(-306.28,4517.11) -290.15,4533.23 -268.41,4533.23 -227.91,4573.73 ; -227.91,4574.06 -227.91,4573.73 ; J202.1@552.97,4449.39 298.97,4703.39 -98.58,4703.39 v1(-193.98,4607.99) -193.98,4607.66 -227.91,4573.73
MDIO: J202.2 R209.2 U100.B3 | length 1112.9
  Component Side w5: U100.B3@-290.53,4501.36 v1(-274.78,4517.11)
  Inner Layer 2 w5: v1(-274.78,4517.11) -257.49,4517.11 -216.21,4558.39 v1(-194.9,4558.39) -178.6,4574.69 -178.6,4608.39 -93.6,4693.39 273.11,4693.39 479.97,4486.54 479.97,4472.39 J202.2@552.97,4399.39
  Solder Side w5: v1@-194.09,4558.39 -182.09,4570.39 R209.2@-159.03,4570.39
MONOOUT: U300.9 U301.16 U302.1 | length 719.4
  Component Side w10: v7(-288.2,1862.6) U301.16@-288.2,1884.33 ; v6(-260.2,1424.06) U300.9@-260.2,1445.79 ; U302.1@-119.64,1780.65 -119.04,1781.25 v2(-119.04,1819.06)
  Inner Layer 2 w10: v7(-288.2,1862.6) -288.2,1598.6 -260.2,1570.6 v6(-260.2,1424.06)
  Solder Side w10: v7(-288.2,1862.6) -265.5,1839.9 -139.89,1839.9 v2(-119.04,1819.06)
NetANT500_A: ANT500.A C505.2 C506.2 R500.1
NetC101_2: C101.2 R137.1 R143.2 U100.C13 | length 288.1
  Component Side w5: U100.C13@-322.02,4186.4 -305.9,4170.28 -244.11,4170.28 -191.69,4117.85 R143.2@-160.36,4117.85 C101.2@-160.36,4019.85
NetC109_2: C109.2 R145.1 U100.C11 X100.1 | length 725.3
  Component Side w5: X100.1@-420.85,3723.39 -396.44,3723.39 -372.44,3747.39 C109.2@-340.03,3747.39 ; v1(-340.03,3776.2) C109.2@-340.03,3747.39 ; R145.1@-339.85,3684.39 -339.85,3747.21 C109.2@-340.03,3747.39 ; U100.C11@-322.02,4249.39 v1(-306.28,4233.65)
  Inner Layer 1 w5: v1(-340.03,3776.2) -267.83,3848.39 -267.83,3902.57 -257.03,3913.37 -256.47,3913.37 -255.83,3914 -255.83,4047.04 -267.15,4058.35 -267.15,4076.75 -258.83,4085.06 -258.83,4153 -290.9,4185.07 -290.9,4218.27 v1(-306.28,4233.65)
NetC110_2: C110.2 R145.2 U100.C12 X100.4 | length 942.6
  Component Side w5: X100.4@-420.85,3597.41 -394.24,3597.41 -369.05,3572.21 C110.2@-339.85,3572.21 ; R145.2@-339.85,3633.21 C110.2@-339.85,3572.21 ; v1(-339.03,3542.59) C110.2@-339.03,3571.39 C110.2@-339.85,3572.21 ; U100.C12@-322.02,4217.9 v1(-306.28,4202.15)
  Inner Layer 1 w5: v1(-339.03,3542.59) -339.03,3618.2 -374.83,3654 -374.83,3773 -277.83,3870 -277.83,3902.05 -291.83,3916.05 -291.83,4045.55 -277.83,4059.55 -277.83,4075.55 -306.28,4103.99 v1(-306.28,4202.15)
NetC304_2: C304.2 R304.1 | length 49.3
  Component Side w5: R304.1@-238.2,2194.96 -238.13,2194.89 C304.2@-188.93,2194.89
NetC305_1: C305.1 U301.24 | length 106
  Component Side w5: U301.24@-218.32,2013.27 -198.02,2013.27 -137.39,2073.9
NetC305_2: C305.2 CON300.3 | length 2662
  Component Side w10: CON300.3@-382.83,-289.11 -325.11,-289.11 v2(-282.45,-246.45) ; C305.2@-67.14,2073.9 v2(-9.8,2073.9)
  Inner Layer 2 w10: v2(-282.45,-246.45) -191.45,-246.45 -35.45,-90.45 -35.45,103.55 -9.8,129.2 v2(-9.8,2073.9)
NetC306_1: C306.1 U301.23 | length 112.6
  Component Side w5: U301.23@-218.32,1993.58 -183.32,1993.58 -153,2023.9 C306.1@-118.32,2023.9
NetC306_2: C306.2 CON300.1 CON300.2 CON300.4 M300.2 | length 3905.6
  Component Side w10: v2(-719.45,33) -719.45,-205.45 -732.24,-218.24 CON300.4@-732.24,-332.42 -556.48,-332.42 -481.68,-407.22 CON300.1@-382.83,-407.22 ; C306.2@-67.14,2023.9 17.96,2023.9 57.45,2063.39 ; 58.76,2064.29 58.76,2183.9 94.53,2219.67 M300.2@205.96,2219.67
  Inner Layer 2 w10: v10(40.82,104.82) v2(40.82,2046.75)
  Solder Side w10: v2(-719.45,33) -31,33 v10(40.82,104.82)
NetC307_2: C307.2 U301.22 | length 100
  Component Side w5: U301.22@-218.32,1973.9 C307.2@-118.32,1973.9
NetC308_1: C308.1 U302.2 | length 870
  Component Side w10: U302.2@-157.04,1780.65 -157.04,1762.27 -129.83,1735.06 172.96,1735.06 306.18,1601.83 C308.1@306.18,1279.89
NetC308_2: C308.2 C309.2 J301.1 R318.1 | length 524.7
  Component Side w10: C308.2@69.96,1279.89 69.96,929.85 71.96,927.85 C309.2@106.96,927.85 ; C309.2@107.16,928.06 J301.1@243.96,928.06
NetC400_1: C400.1 J400.12
NetC401_1: C401.1 J400.11
NetC402_1: C402.1 J400.10
NetC403_1: C403.1 J400.9
NetC404_1: C404.1 J400.8
NetC507_2: C507.2 R501.1 U500.15 U500.16 | length 222.4
  Component Side w7: C507.2@-1359.09,5698.23 R501.1@-1359.09,5763.23 -1307.23,5763.23 -1297.52,5753.52 U500.16@-1231.31,5753.52 U500.15@-1231.31,5779.11
NetC508_2: C508.2 R514.1 U502.15 U502.16 | length 222.6
  Component Side w5: C508.2@-1359.09,5168.23 R514.1@-1359.09,5233.23 -1308.2,5233.23 -1297.91,5243.52 U502.16@-1231.31,5243.52 U502.15@-1231.31,5269.11
NetC601_2: C601.2 C602.2 R601.1 U600.1 U600.10
NetC603_2: C603.2 R602.1 U600.6 U600.7 U600.8
NetC636_2: C636.2 R611.1 U605.2 | length 195.2
  Component Side w20: R611.1@-1234.13,4952.44 R611.1@-1233.13,4953.44
  Component Side w50: U605.2@-1427.96,4952.44 R611.1@-1234.13,4952.44
NetCON200_2: CON200.2 R232.2 | length 115.1
  Component Side w5: R232.2@-319.16,2912.62 CON200.2@-204.09,2912.62
NetCON200_3: CON200.3 R234.2 | length 115.9
  Component Side w5: R234.2@-319.16,2865.62 CON200.3@-203.28,2865.62
NetCON200_5: CON200.5 R231.2 | length 116.5
  Component Side w5: R231.2@-319.16,2779.62 CON200.5@-202.66,2779.62
NetCON200_7: CON200.7 R233.2 | length 116.1
  Component Side w5: R233.2@-319.16,2692.62 CON200.7@-203.05,2692.62
NetCON200_9: CON200.9 R235.2 | length 115.8
  Component Side w5: R235.2@-319.16,2609.62 CON200.9@-203.37,2609.62
NetCON200_10: CON200.10 R236.2 | length 95.6
  Component Side w5: R236.2@111.16,2489.98 CON200.10@111.16,2585.57
NetCON300_5: CON300.5 M300.1 | length 3015.5
  Component Side w10: CON300.5@-382.83,-171 -382.83,-75.83 v2(-381.45,-74.45) ; v3(18.96,2268.88) M300.1@205.96,2268.88
  Inner Layer 2 w10: v2(-2.07,-74.45) -2.07,94.88 18.96,115.91 v3(18.96,2268.88)
  Solder Side w10: v2(-381.45,-74.45) v2(-2.07,-74.45)
NetD200_1: D200.1 R200.1 | length 81.7
  Component Side w5: R200.1@326,4201.89 R200.1@326.32,4202.21
  Component Side w10: R200.1@326.32,4202.21 D200.1@326.32,4283.49
NetD201_1: D201.1 R210.1
NetD202_1: D202.1 R211.1
NetD203_1: D203.1 R212.1
NetD204_1: D204.1 R213.1
NetD600_1: D600.1 R600.1 | length 64
  Component Side w5: R600.1@-1339.63,-22.02 D600.1@-1339.63,41.98
NetD600_2: D600.2 U601.8 | length 127.9
  Component Side w5: D600.2@-1272.7,41.98 -1236.35,41.98 -1211.72,17.35 U601.8@-1155.05,17.35
NetJ302_3: J302.3 R327.1 | length 1656
  Component Side w5: v10(-1489.58,1831.06) -1216.22,1557.71 -398.64,1557.71 -377.85,1578.5 R327.1@-377.85,1620.49
  Inner Layer 1 w5: J302.3@-1543.63,2173.9 -1517.58,2173.9 -1489.58,2145.9 v10(-1489.58,1831.06)
NetJ302_4: J302.4 R328.1 | length 1813.7
  Component Side w5: J302.4@-1543.63,2123.9 -1574.74,2123.9 -1589.93,2108.71 -1589.93,1824.21 -1520.93,1755.21 -1484.43,1755.21 -1236.93,1507.71 -377.93,1507.71 -327.85,1557.79 R328.1@-327.85,1620.49
NetJ302_5: J302.5 R329.1 | length 902.5
  Component Side w5: J302.5@-1543.63,2073.9 -703.69,2073.9 -685.58,2092.01 R329.1@-648.63,2092.01
NetJ302_6: J302.6 R330.1 | length 898.8
  Component Side w5: J302.6@-1543.63,2023.9 -694.63,2023.9 -685.58,2032.95 R330.1@-648.63,2032.95
NetJ302_7: J302.7 R331.1 | length 895
  Component Side w5: J302.7@-1543.63,1973.9 R331.1@-648.63,1973.9
NetJ302_8: J302.8 R332.1 | length 898.8
  Component Side w5: J302.8@-1543.63,1923.9 -694.63,1923.9 -685.58,1914.84 R332.1@-648.63,1914.84
NetJ302_9: J302.9 R333.1 | length 902.5
  Component Side w5: J302.9@-1543.63,1873.9 -703.69,1873.9 -685.58,1855.79 R333.1@-648.63,1855.79
NetJ400_4: J400.4 R401.2 | length 40
  Solder Side w5: R401.2@15.15,4570.39 38.21,4570.39 v1@50.21,4582.39
  other v1: 51.02,4582.39
NetJ400_5: J400.5 R403.2 | length 40
  Solder Side w5: R403.2@15.15,4520.39 38.21,4520.39 v1@50.21,4532.39
  other v1: 51.02,4532.39
NetJ600_6: J600.6 L602.1 | length 574.7
  Component Side w20: J600.6@-1190.99,-305.22 J600.6@-1190.99,-404.63 -1143.26,-404.63 J600.6@-1114.71,-433.17 J600.6@-1038.93,-433.17 -991.19,-433.17 J600.6@-962.65,-404.63 ; J600.6@-962.65,-305.22 J600.6@-962.65,-404.63 ; L602.1@-839,-405.11 -962.17,-405.11 J600.6@-962.65,-404.63
NetL600_1: L600.1 U600.4
NetL600_2: L600.2 U600.2
NetR100_2: R100.2 U100.K14 | length 854.7
  Component Side w5: R100.2@-967.85,4081.02 R100.2@-967.85,4082.35 -966.51,4081.02 -940.85,4081.02 -904.83,4045 -904.83,3961 v1(-825.83,3882) ; v1(-558.24,4139.16) U100.K14@-542.5,4154.91
  Inner Layer 1 w5: v1(-825.83,3882) -793.46,3882 -764.46,3853 -653.84,3853 -530.83,3976.01 -530.83,4040.69 -511.52,4060 -511.52,4076 -522.84,4087.31 -537.15,4087.31 -558.24,4108.41 v1(-558.24,4139.16)
NetR101_1: R101.1 U100.M9 | length 939.2
  Component Side w5: R101.1@-1112.96,4716.14 R101.1@-1112.96,4716.35 v1(-1112.96,4746.8) ; v1(-621.24,4328.13) U100.M9@-605.49,4312.39
  Inner Layer 1 w5: v1(-1112.96,4746.8) -1075.45,4784.31 -804.07,4784.31 -706.74,4686.97 -706.74,4664.12 -648.85,4606.24 -648.85,4551.07 -585.15,4487.36 -585.15,4364.22 v1(-621.24,4328.13)
NetR102_2: R102.2 U100.K13 | length 869.9
  Component Side w5: R102.2@-967.85,4132.35 -926.19,4132.35 -886.83,4093 -886.83,3965 -804.83,3883 v1(-769.83,3883) ; v1(-558.24,4170.65) U100.K13@-542.5,4186.4
  Inner Layer 1 w5: v1(-769.83,3883) -652.83,3883 -627.83,3908 -627.83,3935.59 -540.83,4022.59 -540.83,4047 -550.83,4057 -550.83,4079.87 -573.99,4103.03 -573.99,4154.91 v1(-558.24,4170.65)
NetR103_1: R103.1 U100.N9 | length 807.2
  Component Side w5: R103.1@-1012.96,4716.14 R103.1@-1012.96,4716.35 v1(-1012.96,4746.8) ; v1(-652.73,4328.13) U100.N9@-636.98,4312.39
  Inner Layer 1 w5: v1@-1012.84,4746.92 v1(-1012.96,4746.8) -798.71,4746.8 -726.74,4674.83 -726.74,4655.84 -668.85,4597.95 -668.85,4511.49 -659.1,4501.74 -647.11,4501.74 -636.61,4491.23 -636.61,4479.25 -627.6,4470.24 -614.15,4470.24 -605.86,4461.95 -605.86,4384.76 -614.87,4375.75 -626.86,4375.75 -636.61,4366 -636.61,4344.26 v1(-652.73,4328.13)
NetR104_2: R104.2 U100.H12 | length 1029.8
  Component Side w5: R104.2@-967.85,4032.35 -940.19,4032.35 -919.83,4012 -919.83,3934 v1(-866.83,3881) ; v1(-495.25,4202.15) U100.H12@-479.5,4217.9
  Inner Layer 1 w5: v1(-866.83,3881) -849.83,3864 -805.81,3864 -805.7,3864.11 -789.71,3864.11 -755.6,3830 -589.83,3830 -558.83,3861 -558.83,3898 -486.15,3970.69 -486.15,4040.24 -470.52,4055.86 -470.52,4081.69 -492.83,4104 -521.12,4104 -542.12,4125 -542.12,4177.02 -533.12,4186.03 -511.37,4186.03 v1(-495.25,4202.15)
NetR105_1: R105.1 U100.M8 | length 830.3
  Component Side w5: R105.1@-1062.96,4716.14 R105.1@-1062.96,4716.35 v1(-1062.96,4746.8) ; v1(-621.24,4359.63) U100.M8@-605.49,4343.88
  Inner Layer 1 w5: v1(-1062.96,4746.8) -1041.52,4768.24 -802.15,4768.24 -716.74,4682.83 -716.74,4659.98 -658.85,4602.09 -658.85,4546.93 -595.15,4483.22 -595.15,4381.33 -616.85,4359.63 v1(-621.24,4359.63)
NetR106_2: R106.2 U100.L14 | length 678.4
  Component Side w5: R106.2@-967.85,3982.35 -967.85,3949.02 v1(-911.83,3893) ; v1(-589.74,4139.16) U100.L14@-573.99,4154.91
  Inner Layer 1 w5: v1(-911.83,3893) -910.83,3894 -875.58,3894 -870.58,3899 -684.83,3899 -671.83,3912 -671.83,3939 -655.44,3955.39 -637.32,3955.39 -572.22,4020.48 -572.22,4043.6 -560.83,4054.99 -560.83,4075.73 -589.74,4104.64 v1(-589.74,4139.16)
NetR107_1: R107.1 U100.P11 | length 583.5
  Component Side w5: R107.1@-964.03,4537.35 v1(-933.37,4537.35) ; v1(-684.23,4265.14) U100.P11@-668.48,4249.39
  Inner Layer 1 w5: v1(-933.37,4537.35) -975.15,4495.58 -975.15,4350.24 -949.15,4324.24 -885,4324.24 -861,4300.24 -728.15,4300.24 -693.05,4265.14 v1(-684.23,4265.14)
NetR108_2: R108.2 U100.M14 | length 901.6
  Component Side w5: v1(-1287.15,3873.39) R108.2@-1287.15,3904.06 ; v1(-621.24,4139.16) U100.M14@-605.49,4154.91
  Inner Layer 1 w5: v1(-1287.15,3873.39) -1267.83,3854.08 -1158.75,3854.08 -1092.83,3920 -743.83,3920 -621.24,4042.6 v1(-621.24,4139.16) v1@-621.15,4139.07
NetR109_1: R109.1 U100.P10 | length 727.6
  Component Side w5: R109.1@-964.03,4587.35 v1(-933.37,4587.35) ; v1(-684.23,4296.64) U100.P10@-668.48,4280.89
  Inner Layer 1 w5: v1(-933.37,4587.35) -989.62,4531.1 -989.62,4345.71 -958.15,4314.24 -889.15,4314.24 -836.17,4261.26 -713.17,4261.26 -700.93,4249.02 -678.61,4249.02 -668.15,4259.48 -668.15,4280.56 v1(-684.23,4296.64)
NetR110_2: R110.2 U100.L13 | length 1151.5
  Component Side w5: v1(-1382.15,3873.57) R110.2@-1382.15,3904.24 ; v1(-589.74,4170.65) U100.L13@-573.99,4186.4
  Inner Layer 1 w5: v1(-1382.15,3873.57) -1382.15,3892.24 -1364.24,3910.14 -1334.24,3910.14 -1310.15,3886.05 -1310.15,3870.24 -1280.91,3841 -1144.83,3841 -1075.83,3910 -736.83,3910 -676.83,3970 -636.85,3970 -586.15,4020.71 -586.15,4046.42 -605.11,4065.39 -605.11,4155.22 v1(-589.74,4170.65)
NetR111_1: R111.1 U100.N8 | length 437.8
  Component Side w5: R111.1@-964.03,4437.35 v1(-933.37,4437.35) ; v1(-652.73,4359.63) U100.N8@-636.98,4343.88
  Inner Layer 1 w5: v1(-933.37,4437.35) -949.15,4421.58 -949.15,4374.24 -920.17,4345.26 -723.13,4345.26 -722.13,4344.26 -677.86,4344.26 -662.49,4359.63 v1(-652.73,4359.63)
NetR112_2: R112.2 U100.N14 | length 795.3
  Component Side w5: v1(-1239.1,3873.86) R112.2@-1239.1,3904.52 ; v1(-652.73,4139.16) U100.N14@-636.98,4154.91
  Inner Layer 1 w5: v1(-1239.1,3873.86) -1172.96,3940 -773.16,3940 -681.83,4031.33 -681.83,4049.55 -652.73,4078.65 v1(-652.73,4139.16)
NetR113_1: R113.1 U100.P9 | length 497.2
  Component Side w5: R113.1@-964.03,4487.35 v1(-933.37,4487.35) ; v1(-684.23,4328.13) U100.P9@-668.48,4312.39
  Inner Layer 1 w5: v1(-933.37,4487.35) -963.15,4457.58 -963.15,4361.24 -936.15,4334.24 -879.29,4334.24 -857.29,4312.24 -700.13,4312.24 v1(-684.23,4328.13)
NetR114_2: R114.2 U100.K12 | length 1464.4
  Component Side w5: v1(-1334.33,3873.67) R114.2@-1334.33,3904.33 ; U100.K12@-542.5,4217.9 v1(-526.75,4233.65)
  Inner Layer 1 w5: v1(-1334.33,3873.67) -1254.9,3794.24 -506.15,3794.24 -464.15,3836.24 -464.15,3900.24 -439.15,3925.24 -439.15,4038.24 -460.15,4059.24 -460.15,4076 -448.01,4088.14 -448.01,4217.9 -463.76,4233.65 v1(-526.75,4233.65)
NetR115_1: R115.1 U100.P8 | length 313.6
  Component Side w5: R115.1@-964.03,4387.35 v1(-933.37,4387.35) ; v1(-684.23,4359.63) U100.P8@-668.48,4343.88
  Inner Layer 1 w5: v1(-933.37,4387.35) -933.25,4387.24 -886.15,4387.24 -858.54,4359.63 v1(-684.23,4359.63)
NetR116_2: R116.2 U100.L12 | length 1741
  Component Side w5: v1(-1477.33,3873.98) R116.2@-1477.33,3904.65 ; U100.L12@-573.62,4217.52 v1(-557.87,4233.27)
  Inner Layer 1 w5: v1(-1477.33,3873.98) -1387.59,3784.24 -453.15,3784.24 -419.83,3817.55 -419.83,3899.01 -396.15,3922.7 -396.15,4041.94 -416.89,4062.68 -416.89,4218.27 -447.85,4249.24 -541.91,4249.24 v1(-557.87,4233.27)
NetR117_1: R117.1 U100.P7 | length 1382.2
  Component Side w5: R117.1@-1670.03,4560.35 v1(-1670.03,4591.02) ; v1(-684.23,4391.13) U100.P7@-668.48,4375.38
  Inner Layer 1 w5: v1(-1670.03,4591.02) -1670.03,4605.35 -1656.15,4619.24 -1607.15,4619.24 -1587.15,4599.24 -1587.15,4566.24 -1559.15,4538.24 -1485.15,4538.24 -1464.15,4559.24 -1464.15,4629.24 -1430.15,4663.24 -909.15,4663.24 -806.15,4560.24 -806.15,4449.24 -759.17,4402.26 -722.31,4402.26 -711.17,4391.13 v1(-684.23,4391.13)
NetR118_2: R118.2 U100.M13 | length 803.8
  Component Side w5: v1(-1192.15,3873.39) R118.2@-1192.15,3904.06 ; v1(-621.24,4170.65) U100.M13@-605.49,4186.4
  Inner Layer 1 w5: v1(-1192.15,3873.39) -1135.54,3930 -764.83,3930 -671.83,4023 -671.83,4044 -637.36,4078.48 -637.36,4150.14 -621.24,4166.27 v1(-621.24,4170.65)
NetR119_1: R119.1 U100.N7 | length 1261.5
  Component Side w5: R119.1@-1560.03,4560.35 v1(-1560.03,4591.02) ; v1(-652.73,4391.13) U100.N7@-636.98,4375.38
  Inner Layer 1 w5: v1(-1560.03,4591.02) -1560.03,4569.12 -1543.15,4552.24 -1494.15,4552.24 -1479.15,4567.24 -1479.15,4633.24 -1438.15,4674.24 -874.6,4674.24 -796.15,4595.78 -796.15,4492.24 -748.15,4444.24 -727.15,4444.24 -708.15,4425.24 -708.15,4416.24 -698.41,4406.5 -677.86,4406.5 -662.49,4391.13 v1(-652.73,4391.13)
NetR120_2: R120.2 U100.J14 | length 768.2
  Component Side w5: R120.2@-967.85,4182.35 v1(-937.19,4182.35) ; v1(-526.75,4139.16) U100.J14@-511,4154.91
  Inner Layer 1 w5: v1(-937.19,4182.35) -945.26,4182.35 -966.15,4203.24 -966.15,4234.06 -947.97,4252.24 -925.15,4252.24 -891.18,4218.27 -646.36,4218.27 -637.36,4227.28 -637.36,4239.27 -627.23,4249.39 -605.49,4249.39 -573.99,4217.9 -489.26,4217.9 -479.13,4207.77 -479.13,4165.03 -489.63,4154.53 -511.37,4154.53 v1(-526.75,4139.16)
NetR121_1: R121.1 U100.M7 | length 1355.5
  Component Side w5: R121.1@-1615.03,4560.35 v1(-1615.03,4591.02) ; v1(-621.24,4391.13) U100.M7@-605.49,4375.38
  Inner Layer 1 w5: v1(-1615.03,4591.02) -1615.03,4556.12 -1583.15,4524.24 -1477.15,4524.24 -1451.15,4550.24 -1451.15,4620.24 -1418.15,4653.24 -947.6,4653.24 -818.63,4524.26 -818.63,4447.57 -763.32,4392.26 -726.45,4392.26 -709.94,4375.75 -646.36,4375.75 -630.99,4391.13 v1(-621.24,4391.13)
NetR122_2: R122.2 U100.M12 | length 1101.7
  Component Side w5: v1(-1429.1,3873.86) R122.2@-1429.1,3904.52 ; v1(-621.24,4202.15) U100.M12@-605.49,4217.9
  Inner Layer 1 w5: v1(-1429.1,3873.86) -1429.1,3899.28 -1378.38,3950 -1038.24,3950 -1018.15,3970.09 -1018.15,4090.24 -960.65,4147.73 -929.42,4147.73 -913.91,4163.24 -720.15,4163.24 -711.81,4154.91 -646.74,4154.91 -636.98,4164.66 -636.98,4182.01 -621.24,4197.76 v1(-621.24,4202.15)
NetR123_1: R123.1 U100.P6 | length 1127.5
  Component Side w5: R123.1@-1505.03,4560.35 v1(-1505.03,4591.02) ; v1(-684.23,4422.62) U100.P6@-668.48,4406.87
  Inner Layer 1 w5: v1(-1505.03,4591.02) -1505.03,4632.35 -1453.15,4684.24 -831.15,4684.24 -786.15,4639.24 -786.15,4498.24 -742.77,4454.86 -720.86,4454.86 -688.62,4422.62 v1(-684.23,4422.62)
NetR124_2: R124.2 U100.M11 | length 1206
  Component Side w5: v1(-1527.15,3873.57) R124.2@-1527.15,3904.24 ; v1(-621.24,4233.65) U100.M11@-605.49,4249.39
  Inner Layer 1 w5: v1(-1527.15,3873.57) -1527.15,3898.24 -1465.38,3960 -1042.38,3960 -1028.15,3974.24 -1028.15,4095.22 -965.64,4157.73 -933.56,4157.73 -918.05,4173.24 -717.15,4173.24 -704.35,4186.03 -647.11,4186.03 -637.36,4195.78 -637.36,4213.14 -621.24,4229.26 v1(-621.24,4233.65)
NetR125_1: R125.1 U100.M6 | length 1086.6
  Component Side w5: R125.1@-1407.03,4716.35 v1(-1407.03,4747.02) ; v1(-621.24,4422.62) U100.M6@-605.49,4406.87
  Inner Layer 1 w5: v1(-1407.03,4747.02) -1377.81,4776.24 -1216.15,4776.24 -1168.15,4728.24 -798.15,4728.24 -736.74,4666.83 -736.74,4651.7 -706.15,4621.1 -706.15,4519.44 -691.15,4504.44 -681.31,4504.44 -668.85,4491.98 -668.85,4479.99 -659.1,4470.24 -645.15,4470.24 -637.15,4462.24 -637.15,4438.53 v1(-621.24,4422.62)
NetR126_2: R126.2 U100.N10 | length 371.9
  Component Side w5: R126.2@-967.85,4282.35 v1(-937.19,4282.35) ; v1(-652.73,4265.14) U100.N10@-636.98,4280.89
  Inner Layer 1 w5: v1(-937.19,4282.35) -906.1,4251.26 -726.45,4251.26 -710.42,4235.24 -678.25,4235.24 -652.73,4260.75 v1(-652.73,4265.14)
NetR127_1: R127.1 U100.N6 | length 848.6
  Component Side w5: R127.1@-1227.03,4716.35 v1(-1227.03,4747.02) ; v1(-652.73,4422.62) U100.N6@-636.98,4406.87
  Inner Layer 1 w5: v1(-1227.03,4747.02) -1185.25,4705.24 -815.15,4705.24 -758.15,4648.24 -758.15,4521.47 -734.16,4497.49 -723.4,4497.49 -696.15,4470.24 -678.61,4470.24 -668.85,4460.49 -668.85,4443.13 -658.85,4433.13 -658.85,4428.74 v1(-652.73,4422.62)
NetR128_2: R128.2 U100.P12 | length 318.4
  Component Side w5: R128.2@-967.85,4232.35 v1(-937.19,4232.35) ; v1(-684.23,4202.15) U100.P12@-668.48,4217.9
  Inner Layer 1 w5: v1(-937.19,4232.35) -912.36,4207.52 -727.43,4207.52 -722.06,4202.15 v1(-684.23,4202.15)
NetR129_1: R129.1 U100.P5 | length 909.6
  Component Side w5: R129.1@-1347.03,4716.35 v1(-1347.03,4747.02) ; v1(-684.23,4454.12) U100.P5@-668.48,4438.37
  Inner Layer 1 w5: v1(-1347.03,4747.02) -1294.25,4694.24 -821.15,4694.24 -768.15,4641.24 -768.15,4517.33 -737.05,4486.24 -727.15,4486.24 -695.03,4454.12 v1(-684.23,4454.12)
NetR130_1: R130.1 U100.P4 | length 842.7
  Component Side w5: R130.1@-1287.03,4716.35 v1(-1287.03,4747.02) ; v1(-684.23,4485.61) U100.P4@-668.48,4469.87
  Inner Layer 1 w5: v1(-1287.03,4747.02) -1269.81,4764.24 -1220.15,4764.24 -1172.15,4716.24 -807.09,4716.24 -746.74,4655.89 -746.74,4647.55 -716.15,4616.96 -716.15,4515.3 -686.46,4485.61 v1(-684.23,4485.61)
NetR131_1: R131.1 U100.J13 | length 396.4
  Component Side w5: R131.1@-744.85,4006.39 -717.44,4033.8 -717.44,4054.26 v1(-699.83,4071.87) ; v1(-526.75,4170.65) U100.J13@-511,4186.4
  Inner Layer 2 w5: v1(-699.83,4071.87) -699.6,4072.1 -699.6,4145.53 -690.6,4154.53 -678.61,4154.53 -668.85,4164.29 -668.85,4176.27 -659.1,4186.03 -615.62,4186.03 -599.64,4202 -558.09,4202 v1(-526.75,4170.65)
NetR132_1: R132.1 U100.H13 | length 357
  Component Side w5: R132.1@-697.85,4006.39 v1(-697.85,4037.05) ; v1(-495.25,4170.65) U100.H13@-479.5,4186.4
  Inner Layer 2 w5: v1(-697.85,4037.05) -668.11,4066.8 -668.11,4145.53 -658.35,4155.28 -520.38,4155.28 -505.01,4170.65 v1(-495.25,4170.65)
NetR133_1: R133.1 U100.F14 | length 187.2
  Component Side w5: R133.1@-509.85,4006.39 -509.85,4015.98 -461.83,4064 -461.83,4109.58 -432.26,4139.16 U100.F14@-416.51,4154.91
NetR134_2: R134.2 U100.G12 | length 307.9
  Component Side w5: R134.2@-603.85,4006.57 v1(-603.85,4037.24) ; v1(-463.76,4202.15) U100.G12@-448.01,4217.9
  Inner Layer 2 w5: v1(-603.85,4037.24) -603.85,4082.98 -592.83,4094 -550.16,4094 -511.37,4132.79 -511.37,4144.78 -500.87,4155.28 -488.88,4155.28 -479.88,4164.29 -479.88,4176.27 -463.76,4192.4 v1(-463.76,4202.15)
NetR135_1: R135.1 U100.D14 | length 154.9
  Component Side w5: R135.1@-368.85,4006.39 -368.85,4139.57 U100.D14@-353.52,4154.91
NetR136_2: R136.2 U100.H14 | length 273
  Component Side w5: R136.2@-650.85,4006.57 v1(-650.85,4037.24) ; v1(-495.25,4139.16) U100.H14@-479.5,4154.91
  Inner Layer 2 w5: v1(-650.85,4037.24) -634.61,4021 -598.34,4021 -560.83,4058.51 -560.83,4069.19 -495.25,4134.77 v1(-495.25,4139.16)
NetR138_2: R138.2 U100.G13 | length 238.4
  Component Side w5: R138.2@-556.85,4006.57 v1(-556.85,4037.24) ; v1(-463.76,4170.65) U100.G13@-448.01,4186.4
  Inner Layer 2 w5: v1(-556.85,4037.24) -534.29,4037.24 -511.52,4060 -511.52,4076 -511.83,4076.31 -511.83,4097 -479.13,4129.7 -479.13,4145.53 -463.76,4160.9 v1(-463.76,4170.65)
NetR139_1: R139.1 Y100.3 | length 144.4
  Component Side w5: R139.1@-109.18,4170.39 -108.64,4169.85 Y100.3@35.02,4169.85
NetR139_2: R139.2 U100.A13 | length 105.6
  Component Side w5: U100.A13@-259.03,4186.4 -252.91,4180.28 -238.11,4180.28 -227.83,4170 -160.76,4170 R139.2@-160.36,4170.39